# EAGLE board klon.brd.old (EAGLE 9.6.2)
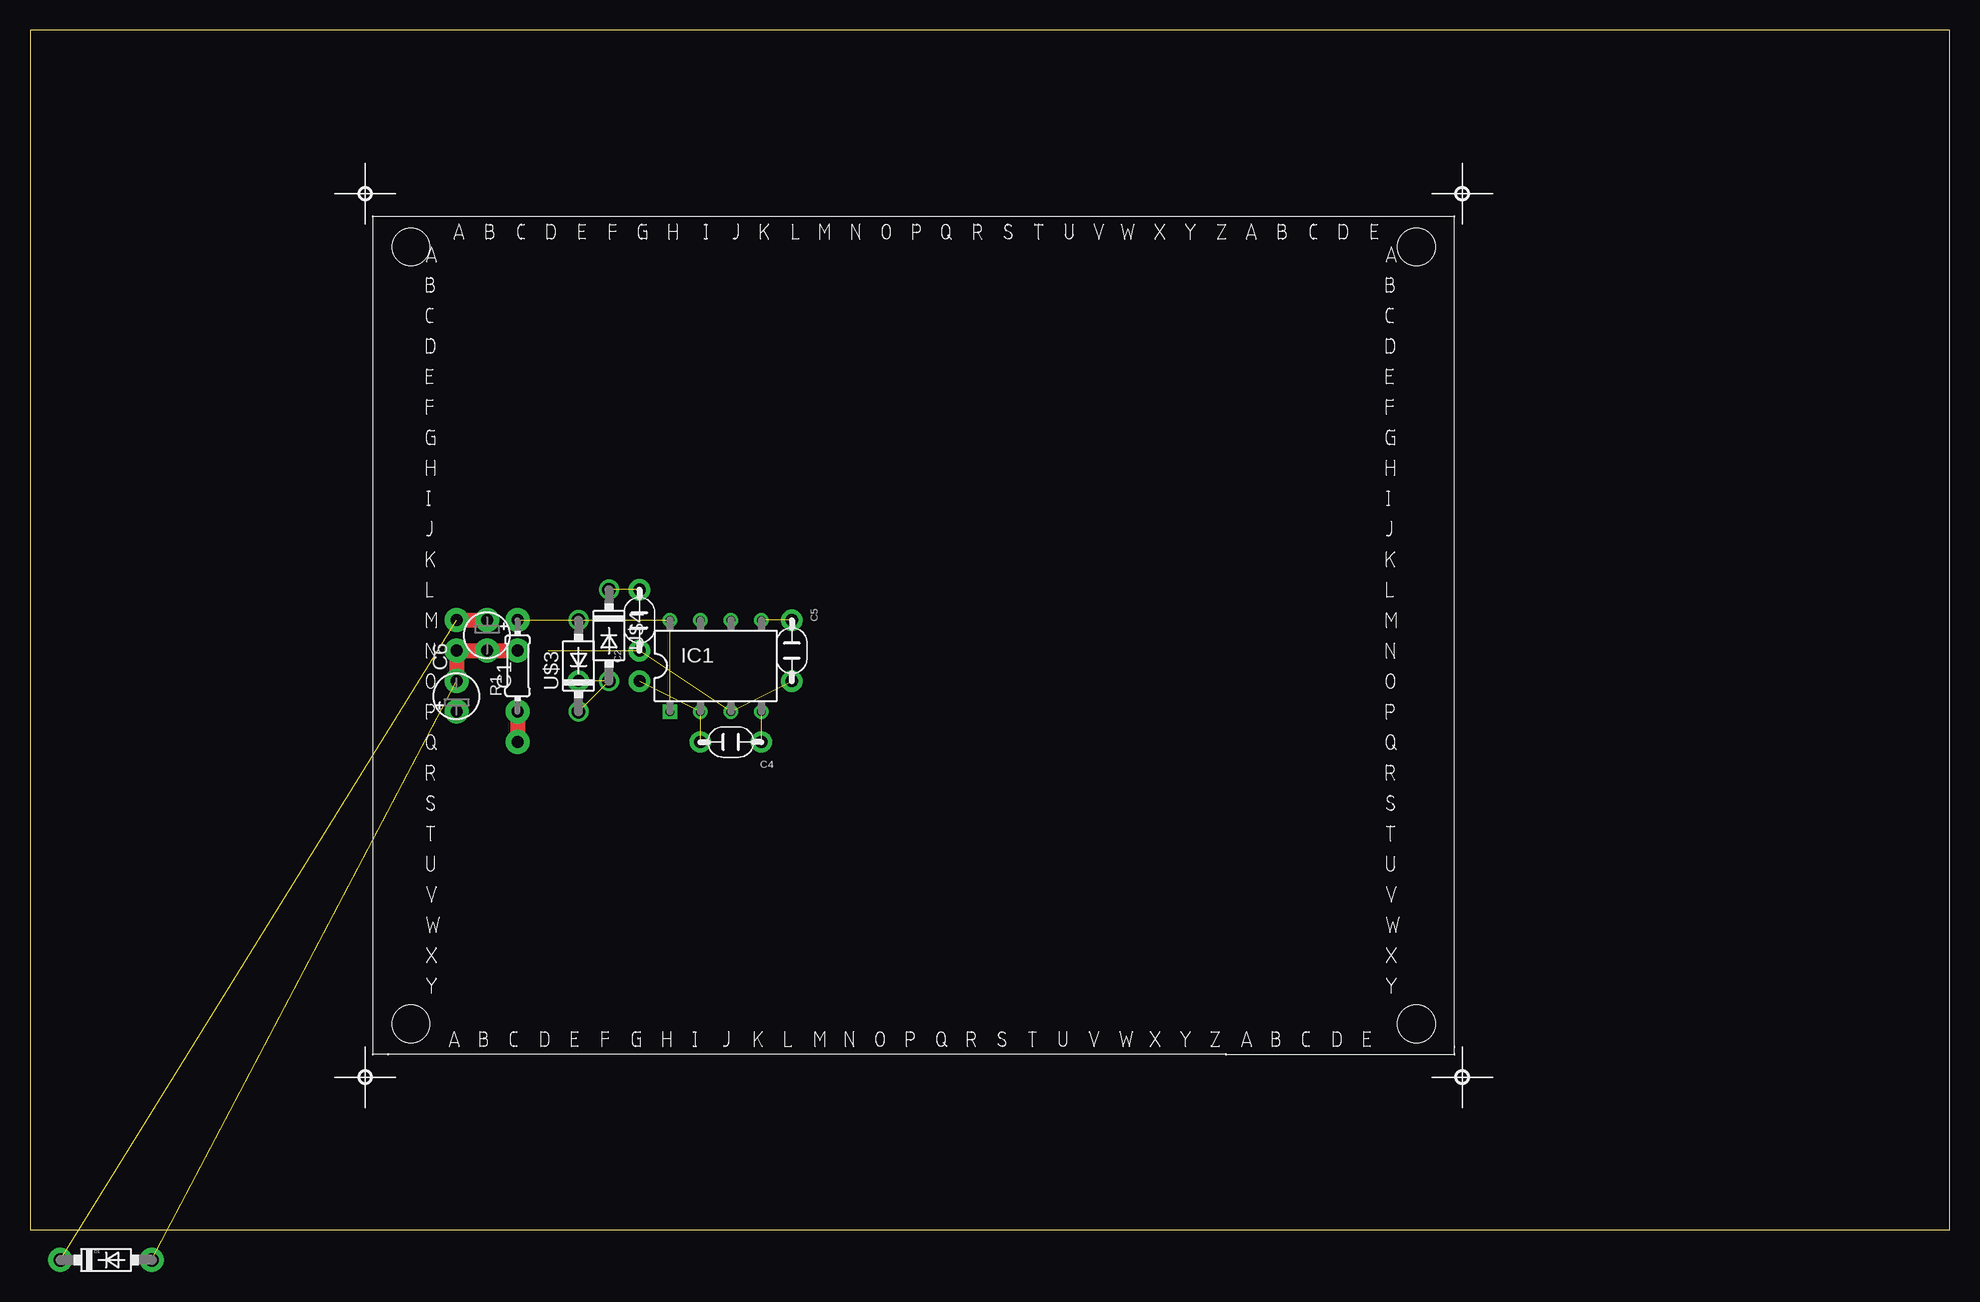
[diagram p0: board, top side]
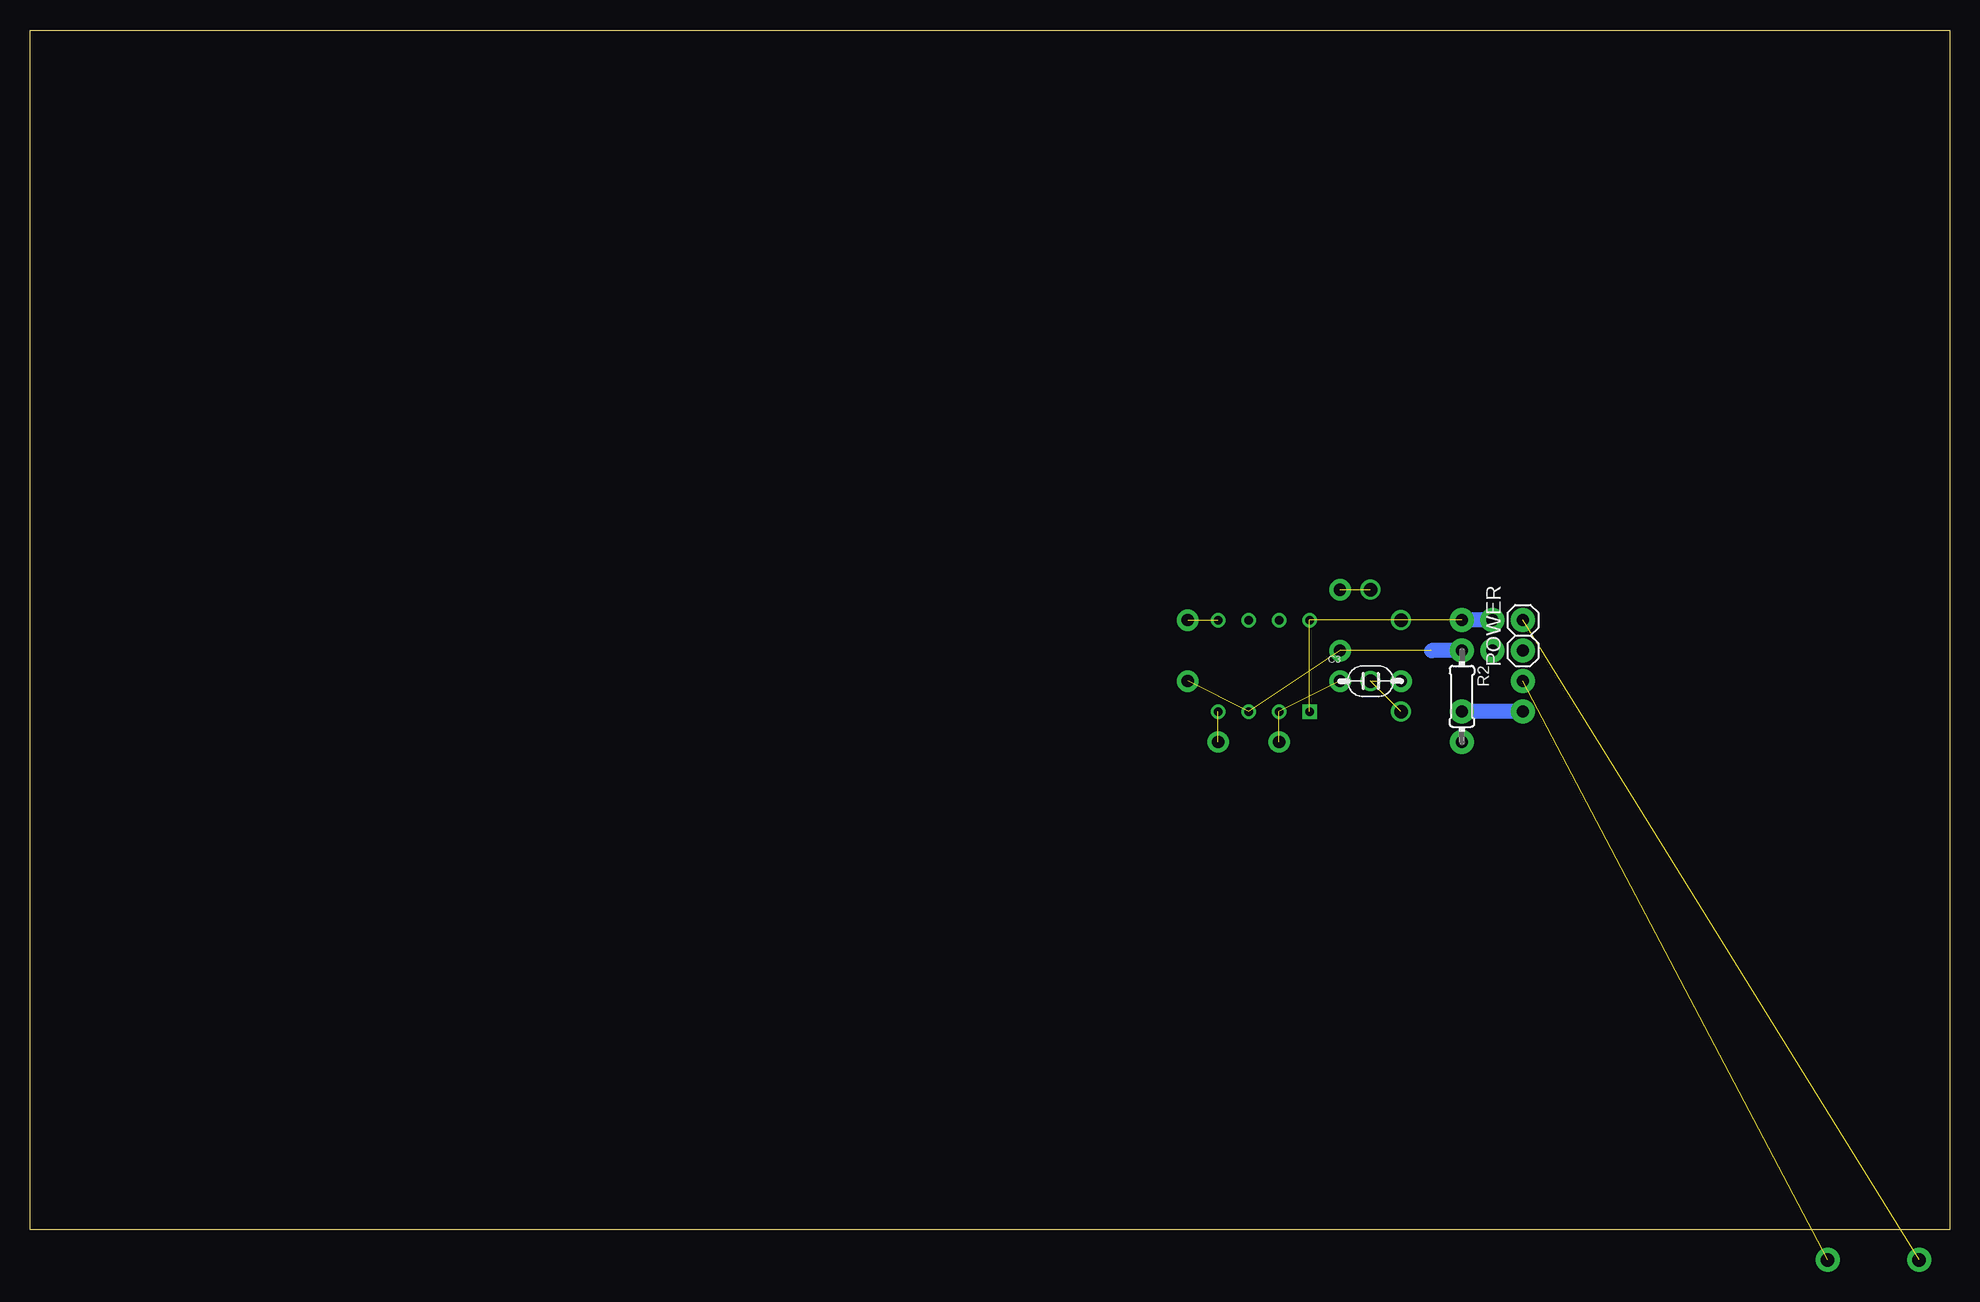
[diagram p1: board, bottom side, seen from below]

Size 160 x 100 mm. Coordinates in mm from the lower left corner, seen from the top.
Outline: 0,0 160,0 160,100 0,100 0,0
Copper layers (1*16): Top 0.035mm / dielectric 1.5mm / Bottom 0.035mm
Design rules "default": minimum track width 6mil, minimum drill 0.35mm, track to track 6mil, track to pad 6mil, pad to pad 6mil, via to via 6mil, smd to smd 6mil, copper to edge 40mil, drill to drill 6mil, minimum pad ring 10mil, minimum via ring 8mil, stop-mask expansion 4mil, vias tented up to drill 0mil, thermal gap 10mil

## Footprints (pad centres in the part's own frame; a part is rotated, then mirrored left to right if it is on the bottom)
C-E-0.1_0.15 = drill 1.016 pad 2: + 0,0; - 2.54,0
C-MM-0.2_0.1 = drill 1.016 pad 1.778: 1 0,0; 2 5.08,0
DO41-7.6 = drill 1.1 pad 2: A 2.54,0; C -5.08,0
DIL08 = drill 0.7 square: 1 -3.81,-3.81 | drill 0.7: 2 -1.27,-3.81; 3 1.27,-3.81; 4 3.81,-3.81; 5 3.81,3.81; 6 1.27,3.81; 7 -1.27,3.81; 8 -3.81,3.81
1X02 = drill 1.016 pad 2: 1 0,0; 2 2.54,0
0204/7 = drill 1.016 pad 2: 1 -2.54,0; 2 5.08,0
DO41-7 = drill 1.118: A 7.62,0; C 0,0

## Placement (x,y rotation side)
C1  47u  [C-E-0.1_0.15]  38.1,50.8 270 top
C2  1u  [C-MM-0.2_0.1]  50.8,48.26 90 top
C3  1u  [C-MM-0.2_0.1]  50.8,45.72 0 bottom
C4  1u  [C-MM-0.2_0.1]  60.96,40.64 180 top
C5  [C-MM-0.2_0.1]  63.5,50.8 270 top
C6  47u  [C-E-0.1_0.15]  35.56,43.18 90 top
D1  1N4742DO41-7.6  [DO41-7.6]  7.62,-2.54 0 top
IC1  MAX1044  [DIL08]  57.15,46.99 0 top
POWER  2_1MM-JACK-PLUG  [1X02]  35.56,48.26 90 bottom
R1  27k  [0204/7]  40.64,45.72 90 top
R2  27k  [0204/7]  40.64,45.72 270 bottom
U$1  [9X7_CM]  25.4,10.16 0 top
U$3  1N4001  [DO41-7]  45.72,43.18 90 top
U$4  1N4001  [DO41-7]  48.26,53.34 270 top

## Library data of the parts
C1-C6 = pedal-library; SPICEPREFIX: C
D1 = pedal-library; AVAILABILITY: Warning; DESCRIPTION: Zener Diode 12V 1W ±5% Through Hole DO-41; MF: EIC Semiconductor; MP: 1N4742; PACKAGE: DO-41 EIC Semiconductor; PRICE: None
IC1 = MAX1044; AVAILABILITY: Unavailable; DESCRIPTION: Charge Pump Switching Regulator IC Positive or Negative Fixed -Vin, nVin, Vin/2 1 Output 20mA 8-SOIC (0.154, 3.90mm Width); MF: Maxim Integrated; MP: MAX1044; PACKAGE: DIP-8 Maxim Integrated; PRICE: None
POWER U$3 U$4 = pedal-library
R1 R2 = pedal-library; SPICEPREFIX: R
U$1 = perfboards; DEPTH: 1.6mm; HEIGHT: 7cm; HOLE_DIA: 3.7mm; PITCH: 0.1in; SIDES: 2; WIDTH: 9cm

## Nets
+4.5V: C6.+ R1.1 R2.2
+9V: C1.+ D1.C IC1.1 IC1.8 POWER.2 R1.2 U$3.A
+16.2V: C2.2 U$4.C
GND: C1.- C2.1 C5.2 C6.- D1.A IC1.3 POWER.1 R2.1
N$2: C5.1 IC1.5
N$3: C3.2 U$3.C U$4.A
N$5: C4.1 IC1.4
N$6: C3.1 C4.2 IC1.2

## Tracks (layer width: path | path; a pad name or v marks a point on that pad's centre or on a via)
+4.5V
  Top 1.27: R1.1 R2.2
  Bottom 1.27: C6.+ R1.1
+9V  (4 unrouted)
  Top 1.27: POWER.2 C1.+
  Bottom 1.27: C1.+ R1.2
+16.2V  (1 unrouted)
GND  (4 unrouted)
  Top 1.27: R2.1 C1.- POWER.1 C6.-
  Bottom 1.27: R2.1 43.18,48.26
N$2  (1 unrouted)
N$3  (2 unrouted)
N$5  (1 unrouted)
N$6  (2 unrouted)